# EAGLE board DX Blame MXII (EAGLE 5.07)
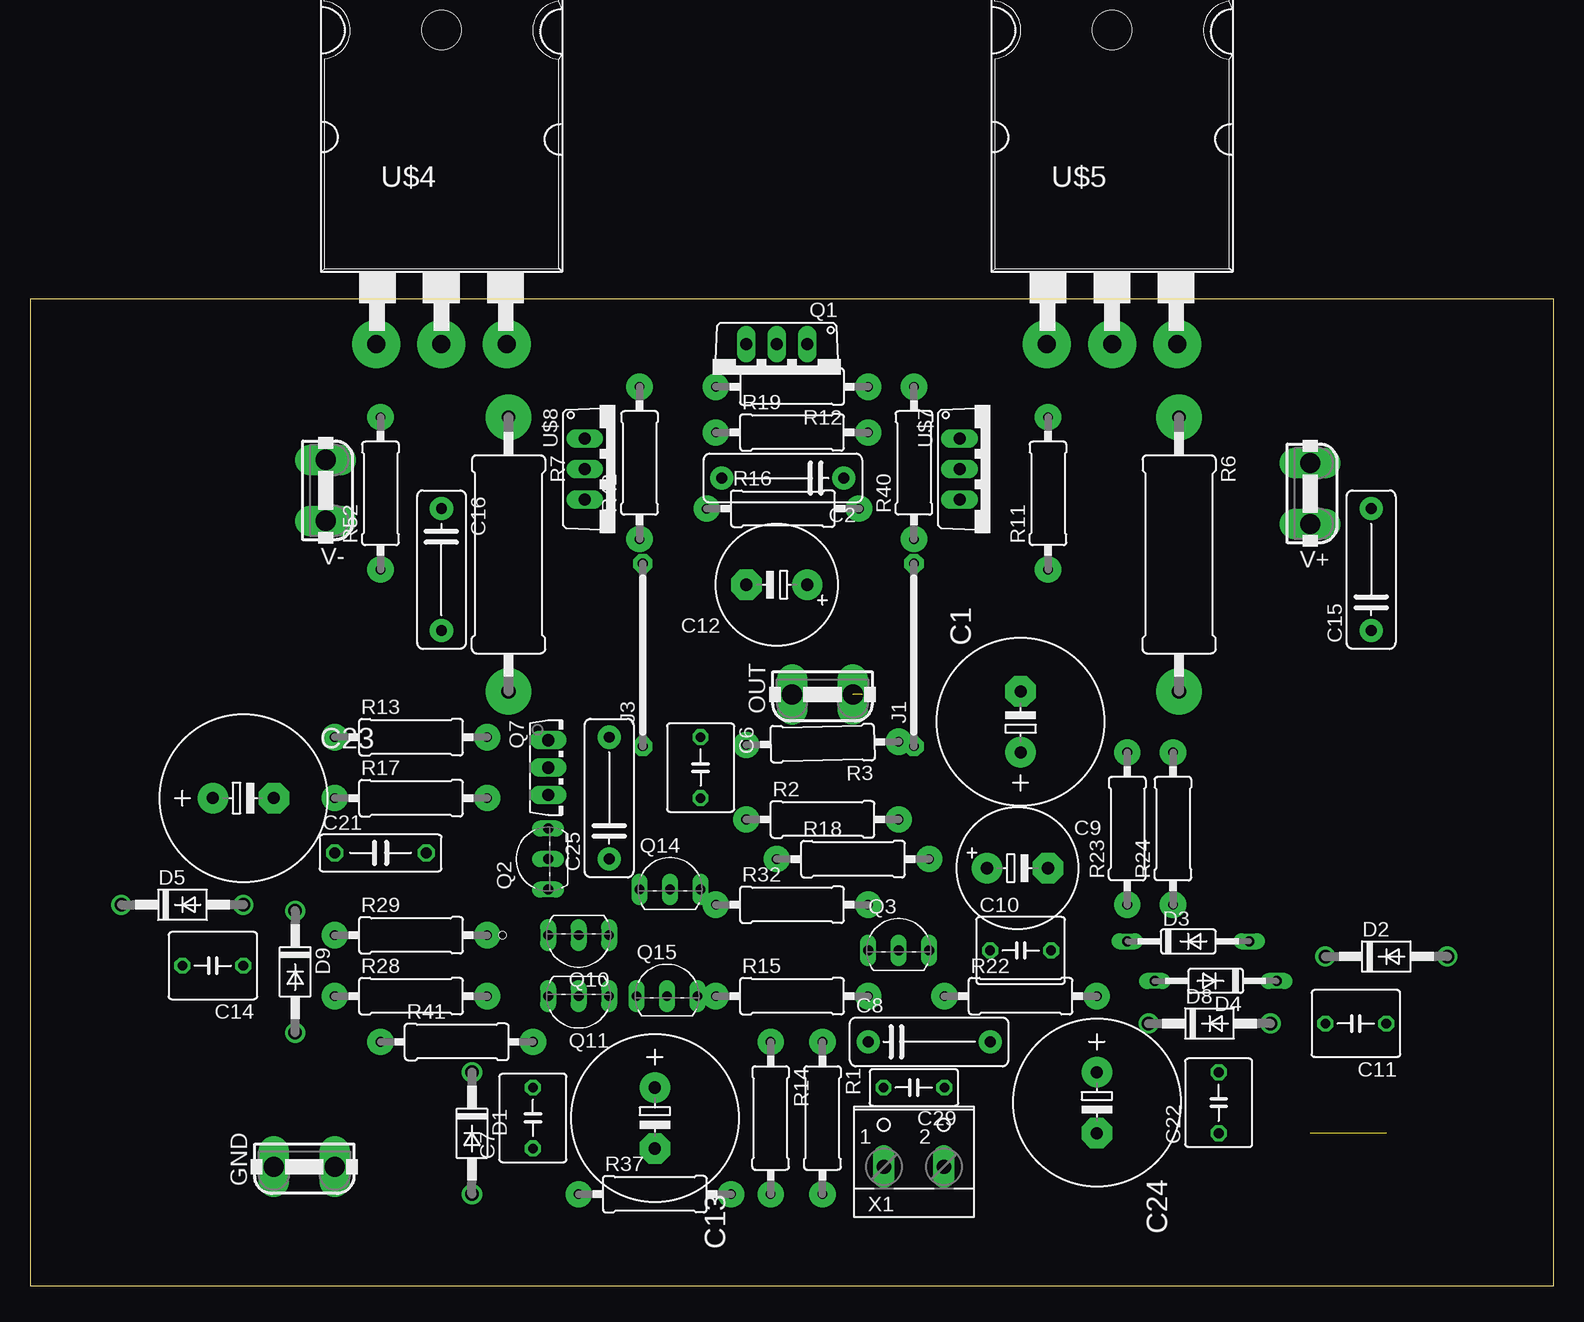
[diagram p0: board, top side]
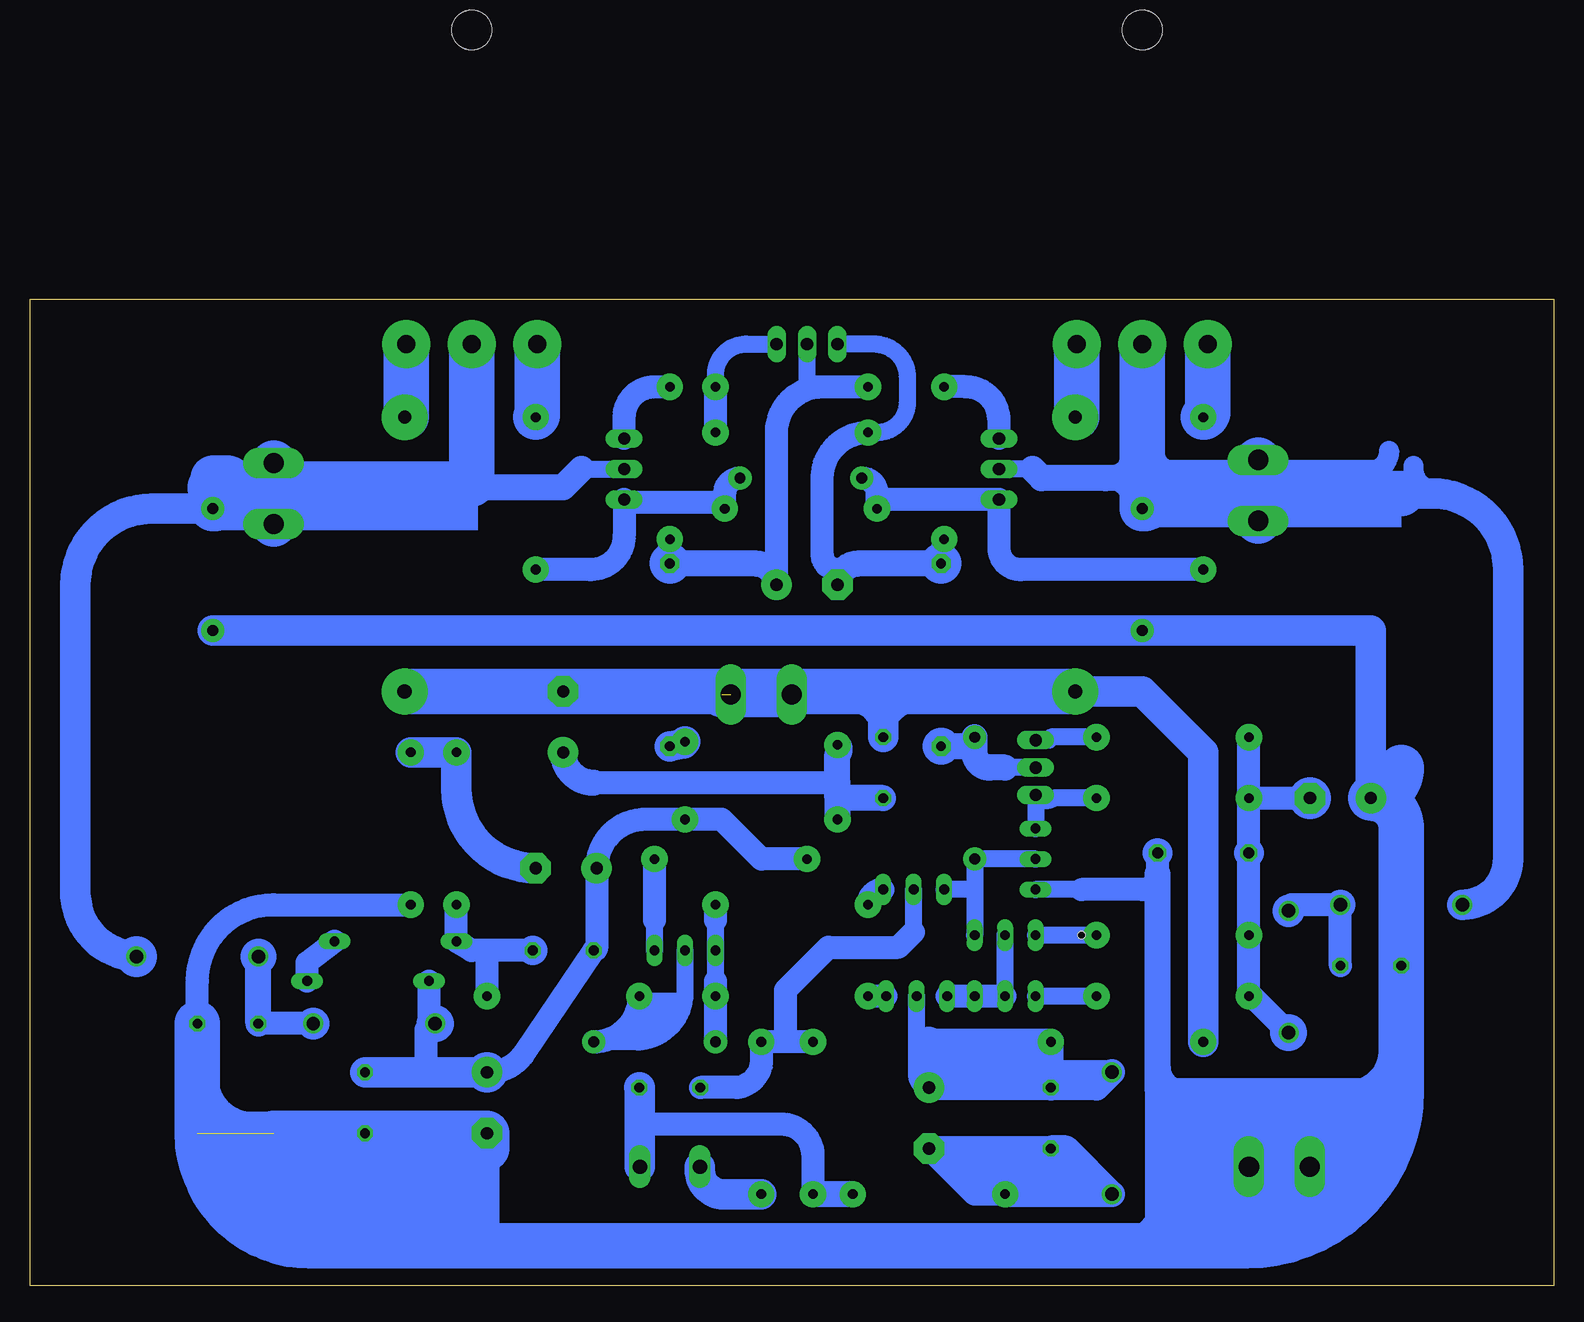
[diagram p1: board, bottom side, seen from below]

Size 126.98 x 82.22 mm. Coordinates in mm from the lower left corner, seen from the top.
Outline: 0,0 126.98,0 126.98,82.22 0,82.22 0,0
Copper layers (1*16): Top 0.035mm / dielectric 1.5mm / Bottom 0.035mm
Design rules "default *": minimum track width 10mil, minimum drill 30mil, track to track 8mil, track to pad 8mil, pad to pad 8mil, via to via 8mil, smd to smd 8mil, copper to edge 40mil, drill to drill 8mil, minimum pad ring 10mil, minimum via ring 8mil, stop-mask expansion 4mil, vias tented up to drill 0mil, thermal gap 10mil
Holes 0.6 mm at 39.37,-82.55 39.37,29.21 252.73,29.21

## Footprints (pad centres in the part's own frame; a part is rotated, then mirrored left to right if it is on the bottom)
E5-13 = drill 1.016 pad 2.54 round: + -2.54,0 | drill 1.016 pad 2.54 octagon: - 2.54,0
C102-043X133 = drill 0.9 pad 1.93 round: 1 -5.08,0; 2 5.08,0
C050-055X075 = drill 0.813 octagon: 1 -2.54,0; 2 2.54,0
E5-10,5 = drill 1.016 pad 2.54 round: + -2.54,0 | drill 1.016 pad 2.54 octagon: - 2.54,0
C075-032X103 = drill 0.914 octagon: 1 -3.81,0; 2 3.81,0
C050-030X075 = drill 0.813 octagon: 1 -2.54,0; 2 2.54,0
DO41-10 = drill 1.118 round: A 5.08,0; C -5.08,0
DO35-10 = drill 0.813 long: A 5.08,0; C -5.08,0
FASTON = drill 1.676 pad 2.54 long: 1 -2.54,0; 2 2.54,0
15 = drill 0.813 pad 1.6 octagon: 1 -7.62,0; 2 7.62,0
TO220AV = drill 1.016 long: B -2.54,-2.54; C 0,-2.54; E 2.54,-2.54
TO92-EBC = drill 0.813 long: B 0,-1.27; C -2.54,-1.27; E 2.54,-1.27
TO126AV = drill 1.016 long: B 2.286,-1.27; C 0,-1.27; E -2.286,-1.27
0309/12 = drill 0.8 pad 2.184 round: 1 -6.35,0; 2 6.35,0
0617/22 = drill 1.1 pad 3.81 round: 1 -11.43,0 | drill 1.2 pad 3.81 round: 2 11.43,0
TO-264 = drill 1.5 pad 4 round: B -5.45,-6.096; E 5.45,-6.096 | drill 1.499 pad 4 round: C 0,-6.096 | hole 3.3: 0,20.09
W237-102 = drill 1.194 long: 1 -2.5,-1.27; 2 2.5,-1.27

## Placement (x,y rotation side)
C1  47uF  [E5-13]  82.55,46.99 90 top
C2  220nF  [C102-043X133]  62.74,67.31 180 top
C6  100nF  [C050-055X075]  55.88,43.18 270 top
C7  100nF  [C050-055X075]  41.91,13.97 90 top
C8  100pF  [C102-043X133]  74.93,20.32 0 top
C9  47uF  [E5-10,5]  82.3,34.8 0 top
C10  100nF  [C050-055X075]  82.55,27.94 0 top
C11  47nF  [C050-055X075]  110.49,21.84 180 top
C12  100uF  [E5-10,5]  62.23,58.42 180 top
C13  330uF  [E5-13]  52.07,13.97 270 top
C14  47nF  [C050-055X075]  15.24,26.67 180 top
C15  68nF  [C102-043X133]  111.76,59.69 90 top
C16  68nF  [C102-043X133]  34.29,59.69 270 top
C21  100nF  [C075-032X103]  29.21,36.07 0 top
C22  100nF  [C050-055X075]  99.06,15.24 90 top
C23  220uF  [E5-13]  17.78,40.64 0 top
C24  220uF  [E5-13]  88.9,15.24 270 top
C25  100pF  [C102-043X133]  48.26,40.64 90 top
C29  220pF  [C050-030X075]  73.66,16.51 180 top
D1  1N4004  [DO41-10]  36.83,12.7 270 top
D2  1N4004  [DO41-10]  113.03,27.43 0 top
D3  1N4148  [DO35-10]  96.52,28.7 0 top
D4  1N4148  [DO35-10]  98.81,25.4 180 top
D5  1N4004  [DO41-10]  12.7,31.75 0 top
D8  1N4004  [DO41-10]  98.3,21.84 0 top
D9  1N4004  [DO41-10]  22.1,26.16 270 top
GND  GND  [FASTON]  22.86,9.91 0 top
J1  J  [15]  73.66,52.58 90 top
J3  J  [15]  51.05,52.58 90 top
OUT  QFIT  [FASTON]  66.04,49.28 0 top
Q1  KSC2690A  [TO220AV]  62.23,75.95 180 top
Q2  BC546B  [TO92-EBC]  41.91,35.56 90 top
Q3  BC556A  [TO92-EBC]  72.39,29.21 0 top
Q7  KSC3503  [TO126AV]  44.45,43.18 270 top
Q10  BC546B  [TO92-EBC]  45.72,27.94 180 top
Q11  BC546B  [TO92-EBC]  45.72,22.86 180 top
Q14  BC556A  [TO92-EBC]  53.34,34.29 0 top
Q15  BC556A  [TO92-EBC]  53.09,25.4 0 top
R1  300R  [0309/12]  66.04,13.97 270 top
R2  4K7  [0309/12]  66.04,38.86 0 top
R3  3K9  [0309/12]  66.04,45.21 181.2 top
R6  .33  [0617/22]  95.76,60.96 270 top
R7  .33  [0617/22]  39.88,60.96 270 top
R11  2R2  [0309/12]  84.84,66.04 90 top
R12  2K  [0309/12]  63.5,74.93 180 top
R13  1R  [0309/12]  31.75,45.72 0 top
R14  47K  [0309/12]  61.72,13.97 270 top
R15  100R  [0309/12]  63.5,24.13 0 top
R16  220R  [0309/12]  62.74,64.77 0 top
R17  220R  [0309/12]  31.75,40.64 0 top
R18  150R  [0309/12]  68.58,35.56 0 top
R19  650R  [0309/12]  63.5,71.12 0 top
R22  3K  [0309/12]  82.55,24.13 0 top
R23  8K2  [0309/12]  91.44,38.1 90 top
R24  8K2  [0309/12]  95.25,38.1 90 top
R28  68R  [0309/12]  31.75,24.13 0 top
R29  68R  [0309/12]  31.75,29.21 0 top
R32  100R  [0309/12]  63.5,31.75 0 top
R37  1K6  [0309/12]  52.07,7.62 0 top
R40  33R  [0309/12]  73.66,68.58 90 top
R41  47K  [0309/12]  35.56,20.32 0 top
R42  33R  [0309/12]  50.8,68.58 90 top
R52  2R2  [0309/12]  29.21,66.04 90 top
U$4  2SA1943  [TO-264]  34.29,84.58 0 top
U$5  2SC5200  [TO-264]  90.17,84.58 0 top
U$7  KSC2690A  [TO220AV]  80.01,68.07 270 top
U$8  KSA1220A  [TO220AV]  48.77,68.07 270 top
V+  QFIT  [FASTON]  106.68,66.04 90 top
V-  QFIT  [FASTON]  24.64,66.29 90 top
X1  IN  [W237-102]  73.66,11.18 0 top

## Library data of the parts
C1 C2 C6-C16 C21-C25 C29 R1-R3 R6 R7 R11-R19 R22-R24 R28 R29 R32 R37 R40-R42 R52 = resistor
D1-D5 D8 D9 = diode
GND OUT V+ V- = keystone
J1 J3 = jumper
Q1 Q7 U$7 U$8 = transistor-power
Q2 Q10 Q11 = transistor-npn
Q3 Q14 Q15 = transistor-pnp
U$4 U$5 = Rudi_TO264
X1 = con-wago-500

## Nets
AGND: C29.1 R14.2 R37.2 X1.2
GND: C11.1 C14.2 C15.1 C16.2 C21.2 C22.1 C23.+ C24.- GND.1 GND.2 Q2.C R24.1
N$1: Q14.E R32.1
N$2: R1.2 X1.1
N$3: C1.+ C6.2 R2.1 R3.2
N$4: R6.1 U$5.E
N$5: R7.1 U$4.E
N$8: Q1.B R12.1 R19.2
N$9: Q7.E R13.2
N$10: C25.2 J3.1 Q7.C
N$11: Q2.E Q7.B R17.2
N$12: R40.2 U$7.B
N$15: C8.1 Q3.C R15.2 R32.2
N$16: R42.2 U$8.B
N$17: C29.2 Q14.B R1.1 R14.1
N$18: C2.2 R16.1 R52.1 U$8.E
N$19: C2.1 R11.1 R16.2 U$7.E
N$20: C7.2 C13.+ D1.C Q15.B R41.2
N$21: J1.1 R3.1
N$22: C7.1 C13.- D1.A R37.1
N$24: C8.2 Q3.B R22.1
N$26: R11.2 U$5.B
N$28: Q3.E R18.2
N$31: C10.2 D3.C R22.2 R23.1
N$34: C21.1 C23.- D9.A R13.1 R17.1 R28.1 R29.1
N$35: C9.- R23.2 R24.2
N$37: D3.A D4.C
N$38: Q11.E R28.2
N$39: C11.2 D2.C D8.A
N$40: C12.- J3.2 Q1.E R19.1 R42.1
N$41: C14.1 D5.A D9.C
N$43: Q10.E R29.2
N$44: Q15.E R15.1
N$45: C12.+ J1.2 Q1.C R12.2 R40.1
N$46: Q10.B Q11.B Q11.C Q15.C
N$54: R52.2 U$4.B
N$57: C15.2 D2.A U$5.C U$7.C V+.1 V+.2
N$58: C16.1 D5.C U$4.C U$8.C V-.1 V-.2
N$60: C25.1 Q2.B Q10.C Q14.C
N$93: C9.+ C10.1 C22.2 C24.+ D4.A D8.C R2.2 R18.1
VCCIO: C1.- C6.1 OUT.1 OUT.2 R6.2 R7.2 R41.1

## Tracks (layer width: path | path; a pad name or v marks a point on that pad's centre or on a via)
AGND
  Bottom 1.93: X1.2 76.16,12.66 arc-90 76.2,12.7 76.2,12.95 arc90 75.95,13.21 arc90 75.69,13.46 64.52,13.46 arc90 61.72,10.92 R14.2
  Bottom 2.184: R37.2 R14.2
  Bottom 2.54: X1.2 76.16,16.47 arc-90 C29.1
GND  (1 unrouted)
  Bottom 1.422: 39.37,33.02 Q2.C
  Bottom 1.93: R24.1 106.68,31.75 arc-90 113.03,25.4 C11.1 | 39.37,33.02 34.29,33.02 arc-90 33.02,34.29 C21.2
  Bottom 2.184: 33.02,18.29 33.02,16.51 arc-90 31.75,15.24 | 33.02,18.29 33.02,34.29 | 33.02,18.29 arc-90 30.73,16
  Bottom 2.54: C15.1 C16.2 15.24,54.61 C23.+
  Bottom 3.81: C14.2 12.7,38.1 arc-90 C23.+ arc-90 12.7,43.18 | GND.2 GND.1 | GND.2 22.86,11.43 arc90 30.99,3.3 | 88.9,11.43 C24.- C22.1 106.68,12.7 | GND.2 31.75,15.24 | C14.2 12.7,16.26 arc90 25.65,3.3 30.99,3.3 | C11.1 113.03,12.7 arc-90 103.63,3.3 30.99,3.3 | C14.2 12.7,19.56 arc90 17.02,15.24
N$1
  Bottom 1.93: Q14.E arc-90 R32.1
N$2
  Bottom 2.54: R1.2 69.38,7.62 arc90 X1.1
N$3
  Bottom 1.93: 59.69,41.91 80.01,41.91
  Bottom 2.184: C6.2 59.69,40.64 | 59.69,40.64 59.69,41.91 59.69,44.32 arc-95 R3.2 | 59.69,40.64 R2.1 | 80.01,41.91 arc90 C1.+
N$4
  Bottom 3.81: U$5.E 95.62,72.53 arc90 R6.1
N$5
  Bottom 3.81: R7.1 arc-90 39.74,72.53 U$4.E
N$8
  Bottom 1.422: Q1.B 67.31,78.49 arc-90 69.85,75.95 R12.1
  Bottom 1.93: R19.2 R12.1
N$9
  Bottom 1.422: R13.2 41.91,45.72 arc90 42.16,45.47 Q7.E
N$10
  Bottom 1.422: Q7.C 45.72,43.18
  Bottom 2.184: 45.72,43.18 46.99,43.18 arc90 48.26,44.45 | 48.26,44.45 C25.2 | J3.1 48.77,44.96 arc90 48.26,44.45
N$11
  Bottom 1.422: R17.2 41.66,40.64 arc90 Q7.B Q2.E
N$12
  Bottom 1.93: R40.2 74.93,74.93 arc-90 77.47,72.39 U$7.B
N$15
  Bottom 1.422: 69.85,30.48 Q3.C 69.85,25.4
  Bottom 1.93: 69.85,30.48 R32.2 | C8.1 R15.2 69.85,25.4
N$16
  Bottom 1.93: R42.2 49.02,74.93 arc90 46.23,72.14 U$8.B
N$17
  Bottom 1.422: 53.34,29.46 Q14.B
  Bottom 1.93: C29.2 68.07,16.51 arc-90 66.04,19.05 R1.1 64.01,20.32 | R14.1 64.01,20.32 | 53.34,29.46 54.61,28.19 60.45,28.19 64.01,24.64 64.01,20.32
N$18
  Bottom 1.93: C2.2 arc90 56.39,66.04 56.39,65.28 | 56.39,65.28 R16.1 | R52.1 44.45,59.69 arc90 46.23,61.47 U$8.E 56.13,65.53 56.39,65.28
N$19
  Bottom 1.93: C2.1 arc-90 69.09,66.04 69.09,65.28 | R16.2 69.09,65.28 | R11.1 80.26,59.69 arc-90 77.47,62.48 U$7.E arc-90 77.22,65.28 69.09,65.28
N$20
  Bottom 1.422: Q15.B 53.09,17.53 arc-90 C13.+
  Bottom 2.184: 52.07,20.32 R41.2 C7.2 38.1,16.51 D1.C
  Bottom 2.54: 52.07,20.32 C13.+
N$21
  Bottom 2.54: J1.1 72.51,45.21 arc90 R3.1
N$22
  Bottom 1.93: C13.- 48.26,7.62 R37.1
  Bottom 2.184: R37.1 D1.A 40.64,11.43 C7.1
N$24
  Bottom 1.422: Q3.B 72.39,24.38 arc90 76.45,20.32 C8.2
  Bottom 1.93: C8.2 arc-90 R22.1
N$26
  Bottom 3.81: R11.2 84.72,72.51 U$5.B
N$28
  Bottom 1.422: Q3.E 74.93,30.48
  Bottom 1.93: 74.93,30.48 R18.2
N$31
  Bottom 1.93: C10.2 88.9,27.94 | 88.9,27.94 90.17,27.94 D3.C R23.1 | 88.9,27.94 R22.2
N$33
  Bottom 1.93: 35.81,3.81 arc-90 32.77,6.86
N$34
  Bottom 1.93: R17.1 C21.1 R29.1 R28.1 25.15,24.13 D9.A | R17.1 R13.1 | R17.1 C23.-
N$35
  Bottom 2.54: C9.- arc90 91.44,41.4 R23.2 R24.2
N$37
  Bottom 1.93: D3.A 103.89,26.92 D4.C
N$38
  Bottom 1.422: R28.2 Q11.E
N$39
  Bottom 1.93: D8.A C11.2
  Bottom 2.184: C11.2 D2.C
N$40
  Bottom 1.422: Q1.E 56.64,78.49 arc90 53.85,75.69 53.85,73.66 arc90 56.39,71.12 R19.1
  Bottom 1.93: J3.2 R42.1 | R19.1 arc-90 60.96,67.31 60.96,60.96 arc-90 59.69,59.69 C12.-
  Bottom 2.184: J3.2 57.91,60.2 arc-90 C12.-
N$41
  Bottom 1.93: D9.C arc-90 21.84,31.75 D5.A C14.1
N$43
  Bottom 1.422: R29.2 Q10.E
N$44
  Bottom 1.93: Q15.E R15.1
N$45
  Bottom 1.422: Q1.C 62.23,74.93 60.96,74.93
  Bottom 1.93: J1.2 R40.1 | R12.2 60.96,74.93 arc-90 64.77,71.12 C12.+
  Bottom 2.184: J1.2 66.55,60.2 arc90 C12.+
N$46
  Bottom 1.422: Q11.B Q10.B
  Bottom 1.93: Q11.B Q11.C Q15.C
N$47
  Bottom 2.54: 105.92,13.21 108.46,13.21 arc90 112.52,17.27
N$48
  Bottom 1.676: 13.72,69.6 arc90 15.49,67.82 16,67.82
N$49
  Bottom 1.676: 31.5,67.82 arc90 33.27,69.6 33.27,70.1
N$51
  Bottom 1.676: 35.31,69.09 arc90 36.83,67.56 37.34,67.56
N$52
  Bottom 1.676: 9.91,66.29 arc90 11.68,68.07 11.68,68.33
N$54
  Bottom 3.81: R52.2 arc-90 28.84,73.01 U$4.B
N$57
  Bottom 1.422: 81.03,68.07 U$7.C
  Bottom 2.184: 81.03,68.07 82.55,66.55 90.93,66.55 91.44,66.04
  Bottom 2.54: D2.A arc90 123.19,33.02 123.19,58.42 arc90 116.84,64.77 C15.2
  Bottom 3.81: 106.68,66.04 91.44,66.04 | 106.68,66.04 110.49,66.04 arc90 C15.2 111.97,66.56 arc-89 111.7,67.31 110.49,67.31 arc90 110.24,66.8 90.17,66.8 U$5.C | 106.68,66.04 V+.1 | 106.68,66.04 V+.2
N$58
  Bottom 1.422: 43.43,68.07 U$8.C
  Bottom 1.676: 35.05,64.77 35.05,65.02 arc-90 37.34,67.31
  Bottom 2.184: 43.43,68.07 42.67,67.31 37.34,67.31 34.29,67.31
  Bottom 2.54: D5.C arc-90 3.81,35.56 3.81,59.69 arc-90 10.16,66.04 13.97,66.04
  Bottom 3.81: U$4.C 34.29,67.31 C16.1 arc-90 33.02,66.04 23.37,66.04 | 12.7,66.04 13.97,66.04 23.37,66.04 | V-.1 V-.2 24.64,67.31 arc-90 23.37,66.04
N$60
  Bottom 1.422: Q2.B C25.1 48.26,33.02 | 48.26,33.02 Q10.C | 48.26,33.02 Q14.C
N$93
  Bottom 1.93: D4.A 93.73,22.35 arc-90 D8.C 93.98,21.34 93.98,17.78 | C24.+ arc-59 85.85,19.3 C10.1 arc-90 79.76,28.19 C9.+ arc90 75.69,38.86 R2.2 69.34,38.86 66.04,35.56 R18.1
  Bottom 2.54: C24.+ 93.98,17.78 C22.2
VCCIO  (1 unrouted)
  Bottom 1.93: 55.88,45.97 arc90 53.09,48.77 | C6.1 55.88,45.97 | 55.88,45.97 arc-90 58.67,48.77
  Bottom 2.184: 91.44,49.53 C1.-
  Bottom 2.54: C6.1 55.88,48.26 arc90 54.61,49.53 | R41.1 29.21,44.45 34.29,49.53 40.89,49.53
  Bottom 3.81: R7.2 40.89,49.53 54.61,49.53 69.34,49.53 | 69.34,49.53 91.44,49.53 R6.2 | OUT.1 69.34,49.28 69.34,49.53
(copper drawn outside any net)
  shapes: Bottom area x21, Bottom circle x15